# Altium PCB PCB1.PcbDoc (part 2 of 2)
Units mm, origin at the board's own origin, x right, y up, seen from the top; angles counter-clockwise.
Board outline 152.5 x 85 mm, 4 copper layers (Top Layer, GND, PWR/GND, Bottom Layer), stack 1.598 mm thick; 151 components, 100 nets, 477 pads, 653 vias.
Unrouted connection lines stored in the file: 110.
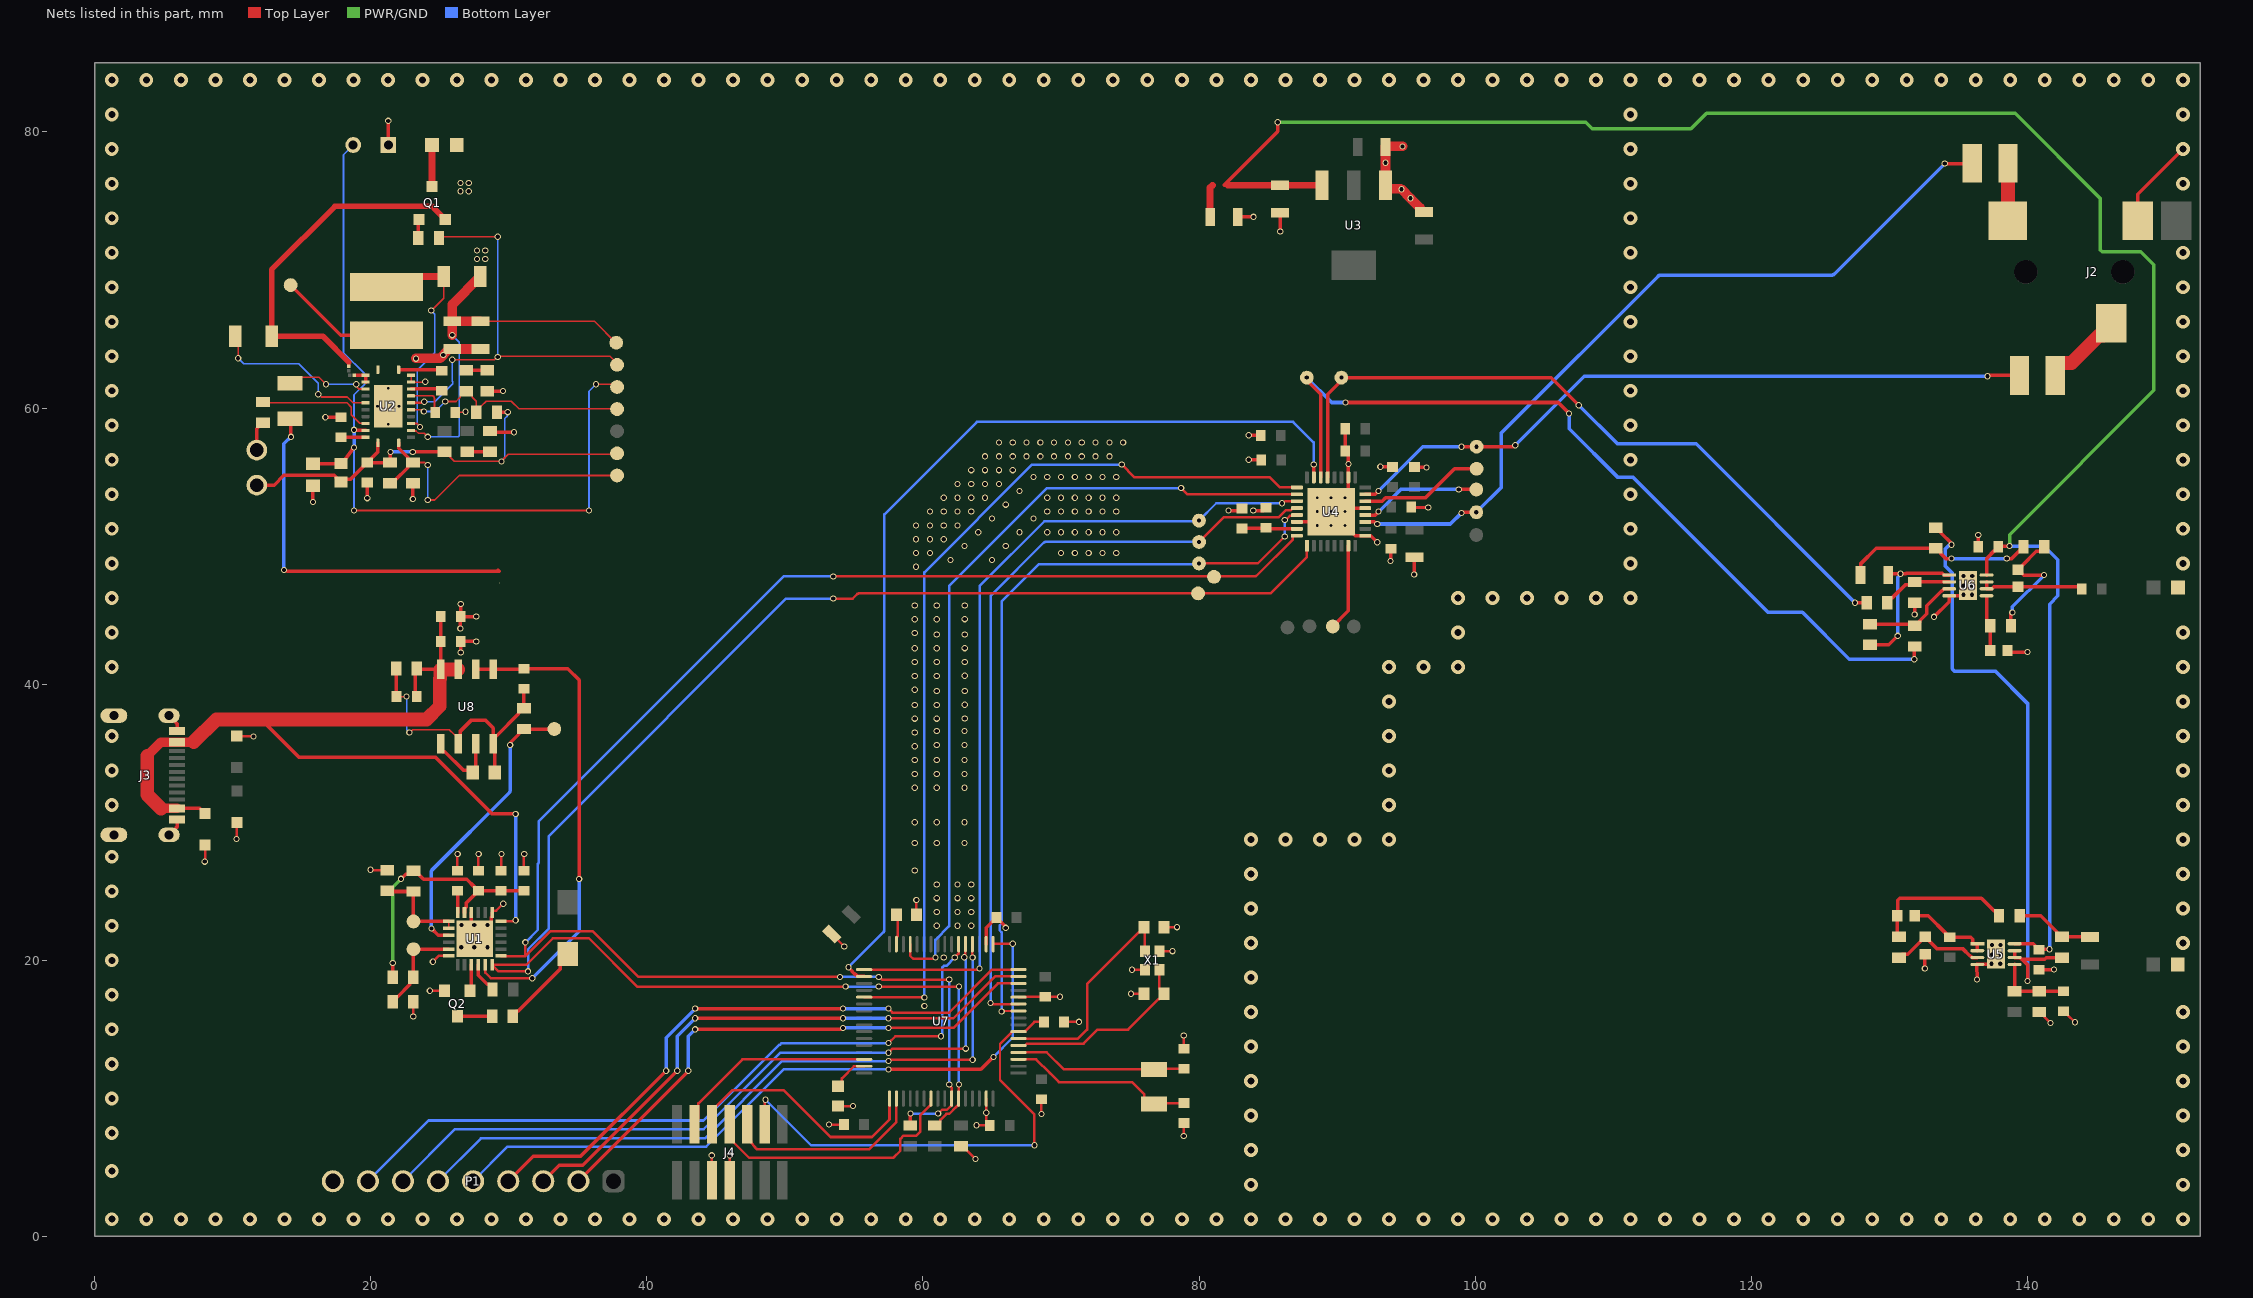
[diagram p4: the nets of this part, all layers, seen from the top]

## Via types
v1: diameter 0.45, hole 0.3, Top Layer to Bottom Layer, tented both sides, 416 vias
v2: diameter 1, hole 0.5, Top Layer to Bottom Layer, tented both sides, 224 vias
v3: diameter 0.5, hole 0.2, Top Layer to Bottom Layer, 13 vias

## Nets (pads, with @x,y where several pads share a name; then routed paths per layer and width w, separated by ;. In a path a pad name is that pad's centre, name@x,y a point inside that pad or via, vN(x,y) a via of type N, cw(c..) or ccw(c..) an arc to the next point about the centre after c; other vN are vias at no path point) (continued)
GND: BT1.2 C7.2 C8.2 C10.2 C11.2 C12.2 C13.2 C14.2 C15.2 C16.2 C17.2 C18.2 C19.2 C20.2 C22.2 C23.2 C24.2 C25.2 C28.2 C29.2 C30.2 C31.1 C32.1 C34.2 C35.2 C36.2 C37.2 C38.2 C39.2 C40.1 C41.2 C42.2 C43.2 C44.2 C45.2 C46.2 C47.2 C48.2 C49.2 C50.2 C51.2 C52.2 C53.2 C54.2 C55.2 D1.1 D2.1 D3.1 J1.2 J2.4 J3.A1_B12 J3.B1_A12 J3.SH1 J3.SH2 J3.SH3 J3.SH4 J4.5 J4.7 J5.2 P1.9 Q2.2 R10.2 R12.1 R27.1 R30.1 R32.1 R33.1 R34.1 R35.2 R36.1 R40.2 U1.6 U1.19 U1.22 U1.25 U2.22 U2.23 U2.25 U3.1 U4.6 U4.17 U4.21 U4.26 U4.33 U5.4 U5.9 U6.4 U6.9 U7.12 U7.18 U7.63 X1.2 X1.4 | length 117.6
  Top Layer w0.12: U2.23@22.925,62.378 U2.22@22.925,61.878 23.928,61.878 v1(23.95,61.9) ; C32.1@26.125,59.69 26.84,59.69 v1(26.875,59.725)
  Top Layer w0.18: v1@8.011,27.171 D3.1@8.011,28.362 ; D1.1@10.298,36.23 v1@11.489,36.23 ; v1@10.308,28.802 D2.1@10.308,29.993 ; v1@20.003,26.533 R36.1@21.194,26.533 ; v1(23.087,15.92) R35.2@23.087,16.995 ; v1(24.284,17.795) Q2.2@25.359,17.795 ; v1(24.5,19.9) 24.917,20.317 U1.6@25.652,20.317 ; C37.2@26.274,26.483 26.274,27.674 v1(26.3,27.7) ; C38.2@27.794,26.483 v1@27.794,27.674 ; U1.19@28.794,23.549 28.831,23.586 29.086,23.586 v1(29.6,24.1) ; C40.1@29.449,26.483 v1@29.449,27.674 ; C39.2@31.1,26.483 v1@31.1,27.674 ; J4.5@44.7,4.8 v1(44.7,5.875) ; J4.7@46,4.8 v1(46,5.875) ; v1(53.2,8.1) C49.2@54.275,8.1 ; C46.2@53.395,21.899 53.401,21.899 v1(54.3,21) ; C53.2@53.848,9.44 v1(54.923,9.44) ; C52.2@59.52,23.3 v1(59.52,24.375) ; R40.2@62.761,6.538 62.862,6.538 v1(63.8,5.6) ; v1@63.882,8.05 C50.2@64.83,8.05 64.579,8.301 U7.63@64.579,9.987 ; U7.12@66.92,17.328 67.417,17.328 67.446,17.358 C51.2@68.857,17.358 v1(69.932,17.358) ; v1(68.58,8.868) C48.2@68.58,9.943 ; C41.2@70.217,15.543 v1(71.292,15.543) ; v1@75.063,17.575 C43.2@76.011,17.575 ; v1(75.13,19.314) X1.2@76.079,19.313 ; X1.4@77.129,20.663 v1(78.078,20.662) ; C42.2@77.451,22.401 v1(78.4,22.4) v1(78.4,22.4) ; v1@78.89,7.266 C45.2@78.89,8.214 ; C44.2@78.89,13.601 v1(78.891,14.55) ; R12.1@141.073,16.036 v1(141.666,15.462) ; C22.2@142.851,16.086 v1(143.444,15.512)
  Top Layer w0.254: J3.SH2@5.397,29.081 5.432,29.081 5.799,29.449 5.799,29.483 5.972,29.656 J3.B1_A12@5.972,30.201 ; J3.SH1@5.397,37.721 5.432,37.721 5.799,37.353 5.799,37.319 5.972,37.146 J3.A1_B12@5.972,36.601 ; v1(15.814,53.194) R30.1@15.814,54.325 ; v1(16.715,59.328) C31.1@17.846,59.328 ; v1(19.751,53.471) C34.2@19.751,54.602 ; R27.1@21.275,79.051 v1(21.275,80.8) ; v1(23.053,53.421) R32.1@23.053,54.552 ; v1(26.494,44.025) C25.2@26.494,44.925 ; v1(26.519,45.8) C25.2@26.519,44.9 v1(27.65,44.9) ; v1(26.525,42.3) 26.519,42.827 C24.2@26.519,43.1 v1(27.65,43.1) ; U1.22@27.294,23.459 27.294,21.817 U1.25@27.544,21.567 28.736,22.759 28.736,23.122 28.794,23.18 U1.19@28.794,23.459 ; R34.1@28.448,61.226 v1(29.579,61.226) ; R33.1@28.641,58.338 28.729,58.25 v1(30.375,58.25) ; U7.18@64.579,21.17 64.579,22.354 65.052,22.827 65.102,22.827 C47.2@65.325,23.05 ; C47.2@65.325,23.1 C47.2@65.325,23.05 ; v1(66,22.35) 65.962,22.388 65.962,22.463 65.598,22.827 65.548,22.827 C47.2@65.325,23.05 ; v1(82.125,52.575) 82.95,52.575 C16.2@83.1,52.725 ; C23.2@82.803,73.847 v1(83.934,73.847) ; v1(83.6,56.25) C19.2@84.5,56.25 ; v1(83.6,58.025) C18.2@84.5,58.025 ; v1(83.925,52.575) 84.641,52.575 C17.2@84.836,52.77 ; C30.2@85.867,74.133 85.868,73.91 v1(85.875,72.775) ; U4.6@87.083,51.75 88.308,51.75 v3(88.558,51.5) ; v3(90.558,51.5) 91.308,50.75 U4.17@92.033,50.75 92.046,50.737 92.438,50.737 v1(92.9,50.275) ; v3(90.558,52.5) 90.808,52.75 U4.21@92.033,52.75 ; v3(90.558,53.5) 90.808,53.75 U4.26@90.808,54.975 90.808,56.478 90.798,56.488 90.798,56.677 C55.2@90.575,56.9 C54.2@90.575,58.5 ; v1(93.125,55.75) C15.2@94.025,55.75 ; v1(93.864,48.93) C12.2@93.864,49.83 ; C11.2@95.351,52.791 95.599,52.793 v1(96.6,52.8) ; v1(95.575,47.95) C13.2@95.575,49.225 ; C14.2@95.575,55.7 v1(96.475,55.7) ; v1(131.825,45.05) 131.826,45.051 R10.2@131.826,45.899 ; v1(132.563,19.402) C7.2@132.563,20.302 ; v1(133.225,44.875) 134.331,45.981 U6.4@134.331,46.403 135.228,46.403 U6.9@135.325,46.5 ; U5.4@136.338,19.725 v1(136.35,18.6) ; U5.4@136.363,19.7 137.191,19.7 137.714,20.223 U5.9@137.714,20.45 ; C20.2@136.435,49.951 v1(136.436,50.8) ; C8.2@138.549,42.446 138.67,42.325 v1(140,42.325) ; C10.2@140.825,19.325 v1(141.925,19.325) ; J2.4@147.98,73.553 147.98,75.48 v2(151.25,78.75)
  Top Layer w0.7: v1@23.275,63.6 25.018,63.6 25.608,64.19 25.608,64.278 C36.2@25.908,64.278 C35.2@27.94,64.278 ; U3.1@93.501,76.009 93.626,75.884 94.616,75.884 v1(94.651,75.849) v1(95.308,75.192) 96,74.5 96,74.2 C28.2@96.3,74.2 ; U3.1@93.501,76.133 U3.1@93.501,76.133 v1(93.5,77.766) C29.2@93.5,78.9 93.5,78.95 v1(94.725,78.95)
  other v1: 78.889,7.265 63.881,8.051 64.579,8.958 60.1,16.7 75.062,17.576 137.4,19.75 138.025,19.75 61.5,20.2 137.425,20.425 138.05,20.425 26.556,20.94 27.505,20.94 28.454,20.94 137.425,21.1 138.05,21.1 61,22.5 62.5,22.5 63.5,22.5 26.575,22.55 27.5,22.55 28.45,22.55 61,23.5 62.5,23.5 63.5,23.5 61,24.5 62.5,24.5 63.5,24.5 61,25.5 62.5,25.5 63.5,25.5 59.4,26.5 19.977,26.559 7.985,27.145 27.82,27.7 29.475,27.7 31.126,27.7 59.4,28.5 61,28.5 63,28.5 10.282,28.776 59.4,30 61,30 63,30 59.4,32.5 61,32.5 63,32.5 59.4,33.5 61,33.5 63,33.5 59.4,34.5 61,34.5 63,34.5 59.4,35.5 61,35.6 63,35.6 11.515,36.204 59.4,36.5 61,36.6 63,36.6 59.4,37.5 61,37.5 63.029,37.507 59.4,38.5 61,38.5 63.029,38.507 61,39.5 63.029,39.507 59.4,39.6 59.4,40.6 61,40.6 63.029,40.607 59.4,41.6 61,41.6 63.029,41.607 59.4,42.6 61,42.6 63.029,42.607 61,43.6 63.029,43.607 59.4,43.7 59.4,44.7 61,44.7 63.029,44.707 59.4,45.7 61,45.7 63.029,45.707 135.35,46.475 135.975,46.475 135.375,47.15 136,47.15 135.375,47.825 136,47.825 59.5,48.5 62,49 65,49 59.5,49.5 60.5,49.5 70,49.5 71,49.5 72,49.5 73,49.5 74,49.5 63,50 66,50 59.5,50.5 60.5,50.5 61.5,50.5 64,51 67,51 69,51 70,51 71,51 72,51 73,51 74,51 59.5,51.5 60.5,51.5 61.5,51.5 62.5,51.5 65,52 68,52 60.5,52.5 61.5,52.5 62.5,52.5 63.5,52.5 69,52.5 70,52.5 71,52.5 72,52.5 73,52.5 74,52.5 66,53 61.5,53.5 62.5,53.5 63.5,53.5 64.5,53.5 69,53.5 70,53.5 71,53.5 72,53.5 73,53.5 74,53.5 67,54 62.5,54.5 63.5,54.5 64.5,54.5 65.5,54.5 68,55 69,55 70,55 71,55 72,55 73,55 74,55 63.5,55.5 64.5,55.5 65.5,55.5 66.5,55.5 90.825,55.95 64.5,56.5 65.5,56.5 66.5,56.5 67.5,56.5 68.5,56.5 69.5,56.5 70.5,56.5 71.5,56.5 72.5,56.5 73.5,56.5 65.5,57.5 66.5,57.5 67.5,57.5 68.5,57.5 69.5,57.5 70.5,57.5 71.5,57.5 72.5,57.5 73.5,57.5 74.5,57.5 23.275,63.575 25.25,63.85
  other v2: 1.25,1.25 3.75,1.25 6.25,1.25 8.75,1.25 11.25,1.25 13.75,1.25 16.25,1.25 18.75,1.25 21.25,1.25 23.75,1.25 26.25,1.25 28.75,1.25 31.25,1.25 33.75,1.25 36.25,1.25 38.75,1.25 41.25,1.25 43.75,1.25 46.25,1.25 48.75,1.25 51.25,1.25 53.75,1.25 56.25,1.25 58.75,1.25 61.25,1.25 63.75,1.25 66.25,1.25 68.75,1.25 71.25,1.25 73.75,1.25 76.25,1.25 78.75,1.25 81.25,1.25 83.75,1.25 86.25,1.25 88.75,1.25 91.25,1.25 93.75,1.25 96.25,1.25 98.75,1.25 101.25,1.25 103.75,1.25 106.25,1.25 108.75,1.25 111.25,1.25 113.75,1.25 116.25,1.25 118.75,1.25 121.25,1.25 123.75,1.25 126.25,1.25 128.75,1.25 131.25,1.25 133.75,1.25 136.25,1.25 138.75,1.25 141.25,1.25 143.75,1.25 146.25,1.25 148.75,1.25 151.25,1.25 83.75,3.75 151.25,3.75 1.25,4.75 83.75,6.25 151.25,6.25 1.25,7.5 83.75,8.75 151.25,8.75 1.25,10 83.75,11.25 151.25,11.25 1.25,12.5 83.75,13.75 151.25,13.75 1.25,15 83.75,16.25 151.25,16.25 1.25,17.5 83.75,18.75 1.25,20 83.75,21.25 151.25,21.25 1.25,22.5 83.75,23.75 151.25,23.75 1.25,25 83.75,26.25 151.25,26.25 1.25,27.5 83.75,28.75 86.25,28.75 88.75,28.75 91.25,28.75 93.75,28.75 151.25,28.75 1.25,31.25 93.75,31.25 151.25,31.25 1.25,33.75 93.75,33.75 151.25,33.75 1.25,36.25 93.75,36.25 151.25,36.25 93.75,38.75 151.25,38.75 1.25,41.25 93.75,41.25 96.25,41.25 98.75,41.25 151.25,41.25 1.25,43.75 98.75,43.75 151.25,43.75 1.25,46.25 98.75,46.25 101.25,46.25 103.75,46.25 106.25,46.25 108.75,46.25 111.25,46.25 1.25,48.75 111.25,48.75 151.25,48.75 1.25,51.25 111.25,51.25 151.25,51.25 1.25,53.75 111.25,53.75 151.25,53.75 1.25,56.25 111.25,56.25 151.25,56.25 1.25,58.75 111.25,58.75 151.25,58.75 1.25,61.25 111.25,61.25 151.25,61.25 1.25,63.75 111.25,63.75 151.25,63.75 1.25,66.25 111.25,66.25 151.25,66.25 1.25,68.75 111.25,68.75 151.25,68.75 1.25,71.25 111.25,71.25 151.25,71.25 1.25,73.75 111.25,73.75 1.25,76.25 111.25,76.25 151.25,76.25 1.25,78.75 111.25,78.75 1.25,81.25 111.25,81.25 151.25,81.25 1.25,83.75 3.75,83.75 6.25,83.75 8.75,83.75 11.25,83.75 13.75,83.75 16.25,83.75 18.75,83.75 21.25,83.75 23.75,83.75 26.25,83.75 28.75,83.75 31.25,83.75 33.75,83.75 36.25,83.75 38.75,83.75 41.25,83.75 43.75,83.75 46.25,83.75 48.75,83.75 51.25,83.75 53.75,83.75 56.25,83.75 58.75,83.75 61.25,83.75 63.75,83.75 66.25,83.75 68.75,83.75 71.25,83.75 73.75,83.75 76.25,83.75 78.75,83.75 81.25,83.75 83.75,83.75 86.25,83.75 88.75,83.75 91.25,83.75 93.75,83.75 96.25,83.75 98.75,83.75 101.25,83.75 103.75,83.75 106.25,83.75 108.75,83.75 111.25,83.75 113.75,83.75 116.25,83.75 118.75,83.75 121.25,83.75 123.75,83.75 126.25,83.75 128.75,83.75 131.25,83.75 133.75,83.75 136.25,83.75 138.75,83.75 141.25,83.75 143.75,83.75 146.25,83.75 148.75,83.75 151.25,83.75
  other v3: 89.558,51.5 88.558,52.5 89.558,52.5 88.558,53.5 89.558,53.5 21.275,58.828 20.5,60.128 22.05,60.128 21.275,61.428
HPLCOM: TP25.1 U4.20 | length 8.8
  Top Layer w0.254: U4.20@92.033,52.25 92.75,52.25 v1(93,52.5) ; v1(98.8,54.1) 100.074,54.1 TP25.1@100.076,54.102
  Bottom Layer w0.254: v1(93,52.5) 94.6,54.1 v1(98.8,54.1)
HPLOUT: C9.2 TP5.1 U4.19 | length 57.1
  Top Layer w0.254: U4.19@92.033,51.75 92.697,51.75 92.847,51.6 v1(92.9,51.6) ; v1(99,52.4) 99.053,52.4 99.104,52.451 v1(100.076,52.451) ; v1(134,77.7) 135.961,77.7 C9.2@135.987,77.726
  Bottom Layer w0.254: v1(92.9,51.6) 98.2,51.6 v1(99,52.4) ; v1(100.076,52.451) 101.9,54.275 101.9,58.2 113.251,69.551 cw(c113.43,69.371) 113.278,69.574 cw(c113.43,69.371) 113.43,69.625 125.82,69.625 ccw(c125.82,69.879) 125.972,69.676 ccw(c125.82,69.879) 125.999,69.699 v1(134,77.7)
HPRCOM: TP26.1 U4.22 | length 9
  Top Layer w0.254: U4.22@92.033,53.25 93.254,53.25 93.504,53.5 96.4,53.5 98.5,55.6 TP26.1@100.1,55.6
HPROUT: C21.2 TP7.1 U4.23 | length 50.9
  Top Layer w0.254: U4.23@92.033,53.75 92.75,53.75 v1(93,54) ; v1(99,57.2) v1(100.1,57.2) 102.747,57.2 102.847,57.3 v1(102.9,57.3) ; v1(137.1,62.3) 137.153,62.3 137.212,62.359 C21.2@139.416,62.359
  Bottom Layer w0.254: v1(93,54) 96.2,57.2 v1(99,57.2) ; v1(102.9,57.3) 107.9,62.3 v1(137.1,62.3)
HSE_IN: C43.1 U7.5 X1.3 | length 14
  Top Layer w0.18: U7.5@66.92,13.828 67.399,13.828 67.424,13.853 67.424,13.865 67.529,13.97 71.628,13.97 72.644,14.986 74.862,14.986 77.061,17.185 77.106,17.185 77.451,17.53 C43.1@77.451,17.575 77.451,17.62 77.129,17.942 X1.3@77.129,19.313
HSE_OUT: C42.1 U7.6 X1.1 | length 16.2
  Top Layer w0.18: U7.6@66.92,14.328 71.224,14.328 71.882,14.986 71.882,18.272 75.651,22.041 75.696,22.041 76.011,22.356 C42.1@76.011,22.401 76.079,22.333 X1.1@76.079,20.663
IOVDD: C16.1 C17.1 U4.7 | length 4
  Top Layer w0.254: C16.1@83.1,51.275 84.791,51.275 C17.1@84.836,51.32 85.109,51.25 U4.7@87.083,51.25
ISET: R21.1 R32.2 TP18.1 U2.13 | length 22.3
  Top Layer w0.12: R32.2@22.928,56.052 23.895,56.052 24.067,55.88 v1(24.13,55.88) ; v1(24.13,53.34) 24.638,53.34 26.416,55.118 TP18.1@37.846,55.118
  Top Layer w0.254: R21.1@21.402,54.552 21.65,54.8 21.801,54.8 22.68,55.679 22.68,55.804 22.928,56.052 22.68,56.3 22.68,56.425 22.025,57.08 U2.13@22.025,57.478
  Bottom Layer w0.12: v1(24.13,53.34) v1(24.13,55.88)
ISINK_COARSE: R25.1 R35.1 TP22.1 U1.5 | length 7.1
  Top Layer w0.254: R35.1@21.587,16.995 21.587,17.12 21.835,17.368 21.96,17.368 22.839,18.247 22.839,18.525 R25.1@23.087,18.773 23.099,18.785 TP22.1@23.099,20.805 23.111,20.817 U1.5@25.652,20.817
JTDI: J4.10 U7.50 | length 14.6
  Top Layer w0.187: J4.10@47.27,8.135 47.547,6.833 47.834,6.449 ccw(c47.984,6.561) 47.851,6.429 47.925,6.355 ; 47.926,6.354 ccw(c48.057,6.487) 48.057,6.3 56.023,6.3 ccw(c56.023,6.487) 56.135,6.337 ccw(c56.023,6.487) 56.155,6.355 58.079,8.279 U7.50@58.079,9.987
LSE_IN: C45.1 U7.3 Y1.2 | length 13.5
  Top Layer w0.18: U7.3@66.92,12.828 68.199,12.828 69.195,11.832 ; 69.195,11.831 69.85,11.176 75.149,11.176 76.016,10.309 76.016,10.054 76.476,9.594 Y1.2@76.731,9.594 76.801,9.664 C45.1@78.89,9.664
LSE_OUT: C44.1 U7.4 Y1.1 | length 12.5
  Top Layer w0.18: U7.4@66.92,13.328 68.968,13.328 70.202,12.094 Y1.1@76.731,12.094 76.788,12.151 C44.1@78.89,12.151
MCU_GPIO_PB13: U4.31 U7.34 | length 72.3
  Top Layer w0.254: v1(54.6,19.5) 54.891,19.209 54.891,19.18 55.101,18.97 55.13,18.97 55.272,18.828 U7.34@55.737,18.828 ; v1(88.3,55.9) 88.308,55.892 U4.31@88.308,54.975
  Bottom Layer w0.187: v1(54.6,19.5) 57.145,22.045 ccw(c57.013,22.177) 57.163,22.065 ccw(c57.013,22.177) 57.2,22.177 57.2,52.3 63.9,59 86.8,59 88.3,57.5 v1(88.3,55.9)
MCU_I2C_SCL: R38.1 TP13.1 U1.13 U4.8 U7.58 | length 121.7
  Top Layer w0.18: U1.13@29.436,20.317 29.453,20.3 31.2,20.3 ; v1(31.2,21.3) 31.2,20.3 ; v1(53.5,47.8) 84.025,47.8 ccw(c84.025,47.98) 84.133,47.836 ccw(c84.025,47.98) 84.153,47.853 86.788,50.488 86.788,50.7 86.838,50.75 U4.8@87.083,50.75 ; v1(54,18.8) 39.4,18.8 36.1,22.1 33,22.1 31.2,20.3 ; v1(56.8,18.8) 56.84,18.8 57.04,18.6 v1(61.9,18.6) ; v1(61.1,8.9) 61.378,9.178 61.737,9.178 62.052,9.493 62.064,9.493 62.079,9.508 U7.58@62.079,9.987 62.079,10.77 61.9,10.948 v1(61.9,11)
  Top Layer w0.254: R38.1@59.078,8.038 59.078,8.878 v1(59.1,8.9)
  Bottom Layer w0.18: v1(31.2,21.3) 32.1,22.2 32.1,26.924 cw(c32.28,26.924) 32.136,27.032 cw(c32.28,26.924) 32.155,27.053 32.155,30.055 49.9,47.8 v1(53.5,47.8) ; v1(54,18.8) v1(56.8,18.8) ; v1(59.1,8.9) v1(61.1,8.9) ; v1(61.9,11) v1(61.9,18.6)
MCU_I2C_SDA: R39.1 TP27.1 U1.12 U4.9 U7.59 | length 124.4
  Top Layer w0.18: v1(31.4,19.2) 29.269,19.2 U1.12@28.794,19.675 31.275,19.675 33.2,21.6 35.8,21.6 39.3,18.1 v1(54.4,18.1) ; v1(53.5,46.2) 54.911,46.193 55.239,46.522 cw(c55.367,46.395) 55.259,46.539 cw(c55.367,46.395) 55.367,46.575 TP27.1@79.925,46.575 ; v1(56.8,18.1) v1(62.6,18.1) ; R39.1@60.856,8.038 60.981,8.038 61.266,8.323 61.266,8.444 61.695,8.873 61.907,8.873 62.4,9.366 62.4,9.378 62.515,9.493 62.564,9.493 62.579,9.508 U7.59@62.579,9.987 62.579,10.979 v1(62.6,11) ; TP27.1@79.925,46.6 85.2,46.6 87.808,49.208 U4.9@87.808,50.025
  Bottom Layer w0.18: v1(31.4,19.2) 31.4,20.8 32.9,22.3 32.9,29 50.094,46.193 v1@53.5,46.193 ; v1(54.4,18.1) v1(56.8,18.1) ; v1(62.6,11) v1(62.6,18.1)
MCU_I2S_BCLK: U4.2 U7.29 | length 58.4
  Top Layer w0.187: U7.29@59.079,21.17 59.079,20.321 59.3,20.1 60.729,20.1 60.829,20.2 v1(60.9,20.2) ; v1(78.7,54.2) 79.15,53.75 U4.2@87.083,53.75
  Bottom Layer w0.187: v1(60.9,20.2) 60.9,21.469 61.9,22.469 61.9,47.1 69,54.2 v1(78.7,54.2)
MCU_I2S_ext_SD: TP12.1 U4.5 U7.10 | length 55.7
  Top Layer w0.18: v1(65.7,16.3) 65.728,16.328 U7.10@66.92,16.328 ; v1(79.99,48.746) 84.246,48.746 v1(86.2,50.7) ; v1(86.2,51.9) 86.273,51.9 86.573,52.2 86.748,52.2 86.798,52.25 U4.5@87.083,52.25
  Bottom Layer w0.18: v1(65.7,16.3) 65.7,22.028 65.56,22.168 65.56,22.532 65.7,22.672 65.7,46 68.4,48.7 79.944,48.7 v1(79.99,48.746) ; v1(86.2,50.7) v1(86.2,51.9)
MCU_I2S_MCLK: U4.1 U7.37 | length 66.1
  Top Layer w0.187: U7.37@55.737,17.328 60.072,17.328 v1(60.1,17.3) ; v1(74.4,55.9) 75.3,55 85.1,55 85.85,54.25 U4.1@87.083,54.25
  Bottom Layer w0.187: v1(60.1,17.3) 60.1,48.1 67.9,55.9 v1(74.4,55.9)
MCU_I2S_SD: TP11.1 U4.4 U7.11 | length 56.3
  Top Layer w0.18: v1(64.9,16.9) 64.972,16.828 U7.11@66.92,16.828 ; v1(80,50.3) 81.8,52.1 85.778,52.1 86.283,52.605 86.653,52.605 86.798,52.75 U4.4@87.083,52.75
  Bottom Layer w0.18: v1(64.9,16.9) 64.9,46.325 cw(c65.08,46.325) 64.936,46.433 cw(c65.08,46.325) 64.952,46.452 68.748,50.248 cw(c68.875,50.12) 68.767,50.264 cw(c68.875,50.12) 68.875,50.3 v1(80,50.3)
MCU_I2S_WS: TP10.1 U4.3 U7.33 | length 61.6
  Top Layer w0.18: U7.33@55.737,19.328 63.954,19.328 ccw(c63.954,19.508) 64.081,19.381 v1(64.1,19.4) ; v1(86,53.1) 86.073,53.1 86.223,53.25 U4.3@87.083,53.25
  Bottom Layer w0.18: v1(64.1,19.4) 64.1,47.1 68.8,51.8 79.944,51.8 v1(79.99,51.846) 81.244,53.1 v1(86,53.1)
MICBIAS: TP8.1 U4.15 | length 6.3
  Top Layer w0.254: TP8.1@89.681,44.18 90.808,45.307 U4.15@90.808,50.025
nBATDRV: R18.2 TP14.1 U2.19 | length 30.6
  Top Layer w0.12: R18.2@24.946,72.32 25.026,72.4 v1(29.2,72.4) ; v1(25.908,63.5) 28.956,63.5 29.21,63.754 37.338,63.754 TP14.1@37.846,63.246
  Top Layer w0.18: U2.19@22.925,60.378 23.729,60.378 23.803,60.452 v1(23.876,60.452)
  Bottom Layer w0.12: v1(23.876,60.452) 24.638,60.452 25.943,61.757 25.943,61.913 25.908,61.948 v1(25.908,63.5) ; v1(29.2,63.7) v1(29.2,72.4)
NetC1_1: C1.1 R2.1 U6.1 | length 11.4
  Top Layer w0.254: R2.1@128.6,42.85 129.95,42.85 v1(130.6,43.5) ; C1.1@129.905,47.903 130.002,48 v1(130.8,48) 131.196,48 131.222,48.026 133.835,48.026 133.958,47.903 U6.1@134.331,47.903
  Bottom Layer w0.254: v1(130.6,43.5) 130.6,47.753 130.8,47.953 v1(130.8,48)
NetC1_2: C1.2 R1.1 R3.2 | length 13.7
  Top Layer w0.254: C1.2@127.905,47.903 127.905,48.705 129.036,49.836 R1.1@133.35,49.836 ; R1.1@133.475,49.836 133.723,49.588 133.723,49.463 134.086,49.1 v1(134.5,49.1) ; v1(138.5,49.1) 138.861,49.1 R3.2@139.712,49.951
  Bottom Layer w0.254: v1(134.5,49.1) v1(138.5,49.1)
NetC2_1: C2.1 R3.1 R8.2 | length 9.3
  Top Layer w0.254: R8.2@138.799,44.224 138.799,45.046 138.9,45.147 v1(138.9,45.2) ; C2.1@139.319,48.292 C2.1@139.346,48.292 ; v1(141.2,47.9) 139.737,47.9 C2.1@139.346,48.292 ; R3.1@141.212,49.951 141.212,49.863 140.964,49.615 140.642,49.615 139.598,48.571 139.598,48.544 C2.1@139.346,48.292
  Bottom Layer w0.254: v1(138.9,45.2) 138.9,45.6 v1(141.2,47.9)
NetC2_2: C2.2 C6.1 U6.6 U6.7 | length 7.5
  Top Layer w0.254: U6.7@137.033,47.403 U6.6@137.033,46.903 137.405,46.903 137.54,47.038 C2.2@139.319,47.038 143.793,47.038 C6.1@143.928,46.903
NetC3_1: C3.1 R5.1 R6.2 | length 10.7
  Top Layer w0.254: R6.2@130.683,21.696 130.564,21.815 C3.1@130.564,23.232 130.6,23.268 130.6,24.351 130.749,24.5 136.666,24.5 137.561,23.605 137.686,23.605 137.934,23.357 R5.1@137.934,23.232
NetC3_2: C3.2 C5.1 U5.1 U5.2 | length 6.1
  Top Layer w0.254: C3.2@131.818,23.232 132.805,23.232 134.093,21.944 134.093,21.894 134.316,21.671 C5.1@134.366,21.671 135.871,21.671 136.02,21.522 136.02,21.206 136.025,21.2 U5.1@136.363,21.2 U5.2@136.363,20.7
NetC4_2: C4.2 R4.1 R5.2 | length 5.8
  Top Layer w0.254: R5.2@139.434,23.232 140.958,23.232 142.121,22.069 142.121,21.944 142.369,21.696 R4.1@142.494,21.696 142.498,21.692 C4.2@144.526,21.692
NetC7_1: C7.1 R6.1 U5.3 | length 6.9
  Top Layer w0.254: R6.1@130.683,20.196 130.931,20.444 131.328,20.444 132.309,21.425 132.309,21.452 132.561,21.704 C7.1@132.588,21.704 ; C7.1@132.615,21.704 132.867,21.452 132.867,21.425 133.469,20.823 135.328,20.823 135.824,20.327 135.864,20.327 135.99,20.2 U5.3@136.363,20.2
NetC8_1: C8.1 R8.1 U6.5 | length 4.1
  Top Layer w0.254: U6.5@137.033,46.403 137.033,44.615 137.299,44.349 R8.1@137.299,44.224 137.299,42.45 C8.1@137.295,42.446
NetC9_1: C9.1 J2.2 | length 4.2
  Top Layer w1: J2.2@138.582,73.553 138.587,73.557 C9.1@138.587,77.726
NetC21_1: C21.1 J2.3 | length 6.2
  Top Layer w1: C21.1@142.016,62.359 142.016,63.059 142.216,63.259 143.183,63.259 145.178,65.254 145.471,65.254 146.075,65.859 J2.3@146.075,66.151
NetC22_1: C22.1 R11.1 R12.2 U5.5 | length 5.5
  Top Layer w0.254: U5.5@139.065,19.7 R11.1@139.065,17.759 R12.2@140.843,17.759 C22.1@142.621,17.759
NetC26_2: C26.2 C27.2 R14.1 R15.1 R17.2 U8.2 U8.4 | length 21.5
  Top Layer w0.12: C26.2@21.875,39.1 v1(22.6,39.1) ; v1(22.8,36.5) 22.835,36.5 23.035,36.7 25.7,36.7 26.064,36.336 26.119,36.336 26.339,36.116 U8.2@26.339,35.685
  Top Layer w0.254: R15.1@21.846,41.125 21.846,39.129 C26.2@21.875,39.1 ; U8.2@26.339,35.685 26.472,35.818 26.472,36.572 27.3,37.4 28.3,37.4 28.879,36.821 U8.4@28.879,36.116 ; R14.1@29,33.6 29,35.563 U8.4@28.879,35.685 U8.4@28.879,36.116 ; C27.2@31.1,39.675 R17.2@31.1,38.25 30.975,38.25 30.727,38.002 30.727,37.877 29.119,36.269 29.031,36.269 U8.4@28.879,36.116
  Bottom Layer w0.12: v1(22.6,39.1) 22.6,36.7 v1(22.8,36.5)
NetC31_2: C31.2 U2.11 | length 1.8
  Top Layer w0.254: C31.2@17.846,57.878 U2.11@19.625,57.878
NetC32_2: C32.2 U2.20 | length 2.8
  Top Layer w0.12: U2.20@22.925,60.878 23.165,60.878 24.477,60.878 cw(c24.477,60.758) 24.582,60.815 24.584,60.813 ccw(c24.746,60.901) 24.591,60.799 cw(c24.491,60.734) 24.603,60.777 cw(c24.331,60.672) 24.622,60.672 24.622,60.03 C32.2@24.675,59.69
NetC33_1: C33.1 U2.21 | length 2.3
  Top Layer w0.254: U2.21@22.925,61.378 25.019,61.378 C33.1@25.146,61.251
NetC37_1: C37.1 U1.24 | length 1.6
  Top Layer w0.254: C37.1@26.274,25.033 26.294,25.013 U1.24@26.294,23.459
NetD4_2: D4.2 R31.2 | length 2.2
  Top Layer w0.254: D4.2@11.75,56.953 11.75,58.498 11.819,58.567 11.819,58.692 12.067,58.94 R31.2@12.192,58.94
NetD5_1: D5.1 R37.2 | length 6.2
  Top Layer w0.254: R37.2@30.294,15.941 30.294,16.066 30.542,16.314 30.667,16.314 33.713,19.36 33.713,19.892 D5.1@34.275,20.454
NetL1_2: L1.2 R19.1 U2.16 | length 17.2
  Top Layer w0.12: U2.16@22.925,58.878 23.37,58.878 23.576,58.673 v1(23.576,58.628) ; v1(24.384,67.056) 25.284,67.956 R19.1@25.284,69.526
  Top Layer w0.5: L1.2@21.148,68.764 22.798,68.764 23.56,69.526 R19.1@25.284,69.526
  Bottom Layer w0.12: v1(23.576,58.628) 23.403,58.8 cw(c23.488,58.885) 23.368,58.885 23.368,62.688 cw(c23.488,62.688) 23.392,62.76 cw(c23.488,62.688) 23.402,62.772 24.638,64.008 24.638,66.802 v1(24.384,67.056)
NetQ1_1: Q1.1 R18.1 | length 1.4
  Top Layer w0.254: R18.1@23.446,72.32 23.446,73.606 Q1.1@23.5,73.66
NetQ2_3: Q2.3 R37.1 | length 2.5
  Top Layer w0.254: Q2.3@26.274,15.941 R37.1@28.794,15.941
NetR2_2: R2.2 R7.1 U6.3 | length 7.3
  Top Layer w0.254: R2.2@128.6,44.35 131.7,44.35 R7.1@131.826,44.224 131.951,44.224 132.199,44.472 132.199,44.597 132.7,45.098 132.7,45.684 133.792,46.776 133.832,46.776 133.958,46.903 U6.3@134.331,46.903
NetR9_1: R9.1 R10.1 U6.2 | length 5.2
  Top Layer w0.254: R9.1@129.85,45.9 129.85,46.025 130.098,46.273 130.223,46.273 131.135,47.185 131.612,47.185 R10.1@131.826,47.399 131.83,47.403 U6.2@134.331,47.403
NetR14_2: R14.2 U8.1 U8.3 | length 5.6
  Top Layer w0.254: U8.1@25.069,35.685 25.069,35.253 25.221,35.1 25.372,35.1 26.718,33.755 27.245,33.755 R14.2@27.4,33.6 27.609,33.809 U8.3@27.609,35.685
NetR16_2: R16.2 U2.4 | length 6.1
  Top Layer w0.12: R16.2@14.163,61.784 14.609,62.23 16.256,62.23 v1(16.764,61.722) ; v1(18.952,61.722) 19.015,61.659 19.015,61.503 19.14,61.378 U2.4@19.625,61.378
  Bottom Layer w0.12: v1(16.764,61.722) v1(18.952,61.722)
NetR20_2: R20.2 U1.10 | length 2.3
  Top Layer w0.254: U1.10@27.794,19.675 27.794,18.916 28.453,18.257 28.578,18.257 28.826,18.009 R20.2@28.826,17.884
NetR28_1: R28.1 R33.2 | length 1.7
  Top Layer w0.254: R28.1@26.99,56.838 R33.2@28.641,56.838
NetR29_1: R29.1 R34.2 | length 1.5
  Top Layer w0.254: R29.1@26.924,62.726 R34.2@28.448,62.726
NRST: C41.1 J4.12 U7.7 | length 34.9
  Top Layer w0.18: J4.12@48.54,8.135 48.54,9.767 48.6,9.827 v1(48.6,9.9) ; v1(68.072,6.604) 68.072,8.835 65.579,11.328 65.579,13.929 66.426,14.776 66.426,14.813 66.441,14.828 U7.7@66.92,14.828 67.399,14.828 67.414,14.843 67.414,14.88 68.077,15.543 C41.1@68.767,15.543
  Bottom Layer w0.18: v1(48.6,9.9) 51.896,6.604 53.848,6.604 v1(68.072,6.604)
OVPSET: R23.1 R29.2 TP16.1 U2.18 | length 17.4
  Top Layer w0.12: U2.18@22.925,59.878 23.633,59.878 23.761,59.75 v1(23.85,59.75) ; v1(25.4,60.475) 26.173,60.475 26.484,60.786 26.484,60.911 26.799,61.226 R29.2@26.924,61.226 27.049,61.226 27.364,60.911 27.364,60.786 27.65,60.5 R23.1@27.65,59.7 27.965,60.14 28.015,60.14 28.375,60.5 30.182,60.5 30.738,59.944 TP16.1@37.846,59.944
  Bottom Layer w0.12: v1(23.85,59.75) 24.675,59.75 v1(25.4,60.475)
PA_0: P1.2 U7.14 | length 39.3
  Top Layer w0.18: v1(57.5,15.1) 62.2,15.1 65.428,18.328 U7.14@66.92,18.328
  Top Layer w0.254: P1.2@35.04,4 43,11.96 v1(43,12) ; v1(43.5,15) 54.047,15 54.147,15.1 v1(54.2,15.1)
  Bottom Layer w0.254: v1(43,12) 43,14.5 v1(43.5,15) ; v1(54.2,15.1) v1(57.5,15.1)
PA_1: P1.3 U7.15 | length 42
  Top Layer w0.18: v1(57.5,15.8) 62.2,15.8 65.228,18.828 U7.15@66.92,18.828
  Top Layer w0.254: P1.3@32.5,4 33.652,5.152 35.352,5.152 v1(42.2,12) ; v1(43.5,15.8) v1(54.2,15.8)
  Bottom Layer w0.254: v1(42.2,12) 42.2,14.5 v1(43.5,15.8) ; v1(54.2,15.8) v1(57.5,15.8)
PA_2: P1.4 U7.16 | length 44.9
  Top Layer w0.18: v1(57.5,16.5) 57.783,16.217 61.9,16.217 65.011,19.328 U7.16@66.92,19.328
  Top Layer w0.254: P1.4@29.96,4 31.76,5.8 35.2,5.8 v1(41.4,12) ; v1(43.5,16.5) v1(54.2,16.5)
  Bottom Layer w0.254: v1(41.4,12) 41.4,14.4 v1(43.5,16.5) ; v1(54.2,16.5) v1(57.5,16.5)
PA_3: P1.5 U7.17 | length 51.6
  Top Layer w0.18: U7.17@65.079,21.17 65.079,21.185 65.094,21.2 v1(66.5,21.2)
  Top Layer w0.254: v1(57.5,12.1) 64.2,12.1 v1(65.1,13)
  Bottom Layer w0.18: P1.5@27.42,4 29.92,6.5 44.302,6.5 49.902,12.1 v1(57.5,12.1) ; v1(65.1,13) 66.5,14.4 v1(66.5,21.2)
PA_4: P1.6 U7.20 | length 50.7
  Top Layer w0.18: v1(57.5,12.7) 57.6,12.8 v1(63.6,12.8) ; U7.20@63.579,21.17 63.579,20.221 v1(63.6,20.2)
  Bottom Layer w0.18: P1.6@24.88,4 27.98,7.1 44.2,7.1 49.8,12.7 v1(57.5,12.7) ; v1(63.6,12.8) v1(63.6,20.2)
PA_5: P1.7 U7.21 | length 52.4
  Top Layer w0.18: v1(57.5,13.3) 57.8,13.6 v1(63.1,13.6) ; v1(62.99,20.226) 62.99,20.299 63.079,20.387 U7.21@63.079,21.17
  Bottom Layer w0.18: P1.7@22.34,4 26.12,7.78 44.125,7.78 49.645,13.3 v1(57.5,13.3) ; v1(62.99,20.226) 63.1,20.116 v1(63.1,13.6)
PA_6: P1.8 U7.22 | length 53.2
  Top Layer w0.187: v1(57.5,14) 58,14.5 v1(61.3,14.5) ; v1(62.3,20.2) 62.579,20.479 U7.22@62.579,21.17
  Bottom Layer w0.187: P1.8@19.8,4 24.2,8.4 44.1,8.4 49.576,13.876 49.64,13.876 49.764,14 v1(57.5,14) ; v1(61.3,14.5) 61.3,14.571 61.4,14.671 61.4,19.49 61.51,19.6 61.7,19.6 v1(62.3,20.2)
PVCC: NT2.1 U2.2 U2.3 | length 1.2
  Top Layer w0.12: 18.934,62.375 18.937,62.378
  Top Layer w0.254: 18.937,62.378 U2.2@19.625,62.378 U2.3@19.625,61.878
Right_Out+: R9.2 TP3.1 U4.29 | length 52.4
  Top Layer w0.254: U4.29@89.308,54.975 89.308,61 90.035,61.727 90.035,61.733 90.3,61.998 v1(90.3,62.2) 105.5,62.2 v1(107.5,60.2) ; v1(127.5,45.9) R9.2@128.35,45.9
  Bottom Layer w0.254: v1(107.5,60.2) 110.3,57.4 116,57.4 v1(127.5,45.9)
Right_Out-: R7.2 TP4.1 U4.30 | length 61.7
  Top Layer w0.254: v1(87.8,62.2) 87.8,62 88.808,60.992 U4.30@88.808,54.975 ; v1(90.6,60.4) 106,60.4 v1(106.8,59.6) ; v1(131.8,41.8) 131.8,42.698 R7.2@131.826,42.724
  Bottom Layer w0.254: v1(87.8,62.2) 89.6,60.4 v1(90.6,60.4) ; v1(106.8,59.6) 106.8,58.5 110.3,55 111.4,55 121.2,45.2 123.7,45.2 127.1,41.8 v1(131.8,41.8)
STAT: R31.1 U2.9 | length 8.4
  Top Layer w0.12: R31.1@12.192,60.44 12.565,60.394 18.265,60.394 18.593,60.066 18.593,59.507 19.2,58.9 19.603,58.9 U2.9@19.625,58.878
SW: C33.2 L1.1 TP20.1 U2.1 U2.24 | length 11.6
  Top Layer w0.254: TP20.1@14.2,68.9 17.836,65.264 L1.1@21.148,65.264 ; U2.24@22.025,62.778 24.873,62.778 C33.2@25.146,62.701
SWCLK: J4.6 U7.49 | length 17.9
  Top Layer w0.187: J4.6@44.78,8.085 45.007,8.312 45.007,9.407 46.2,10.6 49.9,10.6 53.3,7.2 56.3,7.2 57.579,8.479 U7.49@57.579,9.987
SWDIO: J4.4 U7.46 | length 14.9
  Top Layer w0.18: J4.4@43.46,8.135 43.74,8.415 43.74,9.64 46.928,12.828 U7.46@55.737,12.828
SWO: J4.8 U7.55 | length 19.4
  Top Layer w0.18: J4.8@46,8.135 46.28,7.855 46.28,6.82 47.4,5.7 57.783,5.7 ccw(c57.783,5.88) 57.891,5.736 ccw(c57.783,5.88) 57.91,5.753 58.363,6.205 58.363,7.063 58.6,7.3 59.519,7.3 59.793,7.574 59.793,8.759 60.4,9.366 60.4,9.378 60.515,9.493 60.564,9.493 60.579,9.508 U7.55@60.579,9.987
TS: R24.1 R27.2 R30.2 TP15.1 U2.10 | length 60
  Top Layer w0.12: v1(18.796,52.578) v1(35.814,52.578) ; v1(36.322,61.722) TP15.1@37.846,61.722
  Top Layer w0.254: R30.2@15.814,55.975 17.844,55.975 R24.1@17.846,55.977 18.15,56.25 v1(18.796,57.15) ; v1(18.796,58.42) 18.849,58.42 18.891,58.378 U2.10@19.625,58.378
  Bottom Layer w0.12: R27.2@18.735,79.051 18.034,78.35 18.034,64.008 19.558,62.484 19.558,61.722 18.796,60.96 v1(18.796,58.42) ; v1(18.796,52.578) v1(18.796,57.15) ; v1(35.814,52.578) 35.814,61.214 v1(36.322,61.722)
  Bottom Layer w0.254: v1(18.796,57.15) v1(18.796,58.42)
USB_PD_IC_Fault: Q2.1 U1.9 | length 1.9
  Top Layer w0.254: Q2.1@27.189,17.795 27.294,17.9 U1.9@27.294,19.675
V_Bias: R1.2 R4.2 U5.6 U5.7 | length 43.7
  Top Layer w0.254: R1.2@133.35,51.336 133.475,51.336 133.723,51.088 133.723,50.963 134.462,50.224 134.462,50.138 v1(134.5,50.1) ; U5.7@139.065,20.7 U5.6@139.065,20.2 139.437,20.2 139.564,20.073 ; v1(140,18.5) 140,19.676 139.603,20.073 139.564,20.073 ; R4.2@142.494,20.196 141.363,20.196 141.241,20.073 139.564,20.073
  Bottom Layer w0.254: v1(134.5,50.1) 134.462,50.062 134.309,50.062 134.023,49.776 134.023,48.582 134.55,48.055 134.55,41.099 134.699,40.95 137.65,40.95 140,38.6 v1(140,18.5)
VBATT: BT1.1 C35.1 C36.1 Q1.3 R19.2 TP21.1 U2.15 | length 31.9
  Top Layer w0.12: U2.15@22.925,58.378 22.967,58.336 23.288,58.336 23.457,58.166 23.874,58.166 24.128,57.912 v1(24.13,57.912) ; C35.1@27.94,66.278 36.207,66.278 TP21.1@37.785,64.7
  Top Layer w0.5: BT1.1@24.45,79.051 Q1.3@24.45,76.06 Q1.3@24.51,76
  Top Layer w0.7: v1(25.908,65.278) C36.1@25.908,66.278 ; R19.2@27.934,69.526 25.908,67.5 C36.1@25.908,66.278 ; C35.1@27.94,66.278 C36.1@25.908,66.278
  Bottom Layer w0.12: v1(24.13,57.912) 26.346,57.912 26.416,57.982 26.416,59.519 26.415,59.52 26.415,59.86 26.416,59.861 26.416,64.77 v1(25.908,65.278)
  other v1: 27.7,70.8 28.3,70.8 27.7,71.4 28.3,71.4 26.5,75.7 27.1,75.7 26.5,76.3 27.1,76.3
VBUS_FET_EN: R17.1 TP23.1 U1.3 | length 20.9
  Top Layer w0.254: v1(24.4,22.3) 24.883,21.817 U1.3@25.652,21.817 ; v1(30.1,35.6) 30.138,35.638 30.138,35.788 30.727,36.377 30.727,36.502 30.975,36.75 R17.1@31.1,36.75 TP23.1@33.3,36.75
  Bottom Layer w0.254: v1(24.4,22.3) 24.4,26.395 cw(c24.654,26.395) 24.451,26.547 cw(c24.654,26.395) 24.474,26.574 30.026,32.126 ccw(c29.846,32.305) 30.049,32.153 ccw(c29.846,32.305) 30.1,32.305 v1(30.1,35.6)
VBUS_Min_Max: R26.1 R36.2 TP24.1 U1.1 U1.2 | length 7.1
  Top Layer w0.12: U1.2@25.652,22.317 U1.1@25.652,22.817
  Top Layer w0.254: R36.2@21.194,25.033 21.244,24.983 R26.1@23.099,24.983 TP24.1@23.099,22.817 U1.1@25.652,22.817
VCAP1: C52.1 U7.31 | length 2.2
  Top Layer w0.18: U7.31@58.079,21.17 58.079,21.321 58.094,21.336 58.085,21.345 58.085,21.672 58.166,21.754 58.166,22.94 C52.1@58.08,23.3
VCAP2: C53.1 U7.47 | length 2.7
  Top Layer w0.18: C53.1@53.848,10.88 54.122,11.154 54.122,11.45 55,12.328 U7.47@55.737,12.328
VCC: C10.1 C20.1 C30.1 SB2.2 U3.3 U5.8 U6.8 | length 146.9
  Top Layer w0.254: SB2.2@81.803,76.133 85.7,80.03 v1(85.7,80.7) ; U6.8@137.033,47.903 137.033,49.099 137.612,49.678 137.662,49.678 137.885,49.901 C20.1@137.885,49.951 137.934,50 v1(138.7,50) ; U5.8@139.065,21.2 140.421,21.2 140.57,21.051 140.57,21.005 140.793,20.782 140.843,20.782 140.852,20.791 141.591,20.791 v1(141.6,20.8)
  Top Layer w0.5: 82.1,76.133 C30.1@85.867,76.133 U3.3@88.901,76.133
  PWR/GND w0.254: v1(85.7,80.7) 108,80.7 108.475,80.225 115.625,80.225 116.75,81.35 139.1,81.35 145.25,75.2 145.25,71.474 145.399,71.325 148.2,71.325 149.15,70.375 149.15,61.275 138.7,50.825 v1(138.7,50)
  Bottom Layer w0.254: v1(138.7,50) 141.2,50 142.2,49 142.2,46.4 141.6,45.8 v1(141.6,20.8)
VCC_Raw: C24.1 C25.1 C26.1 D3.2 J3.A4_B9 J3.B4_A9 R15.2 U1.18 U8.7 U8.8 | length 72.1
  Top Layer w0.18: U1.18@29.436,22.817 30.417,22.817 v1(30.5,22.9)
  Top Layer w0.254: J3.B4_A9@5.972,31.001 7.632,31.001 D3.2@8.011,30.622 ; 12.065,37.445 14.789,34.721 24.685,34.721 28.806,30.6 v1(30.5,30.6) ; C26.1@23.225,38.95 23.225,41.004 R15.2@23.346,41.125 23.402,41.069 U8.8@25.069,41.069 C24.1@25.069,43.1 C25.1@25.069,44.9
  Top Layer w0.7: 3.81,34.798 4.813,35.801 J3.A4_B9@5.972,35.801 7.179,35.801 ; 4.813,31.001 J3.B4_A9@5.972,31.001
  Top Layer w1: 3.81,34.798 3.81,32.004 4.813,31.001 ; 7.179,35.801 8.823,37.445 12.065,37.445 24.045,37.445 25,38.4 25,40.364 25.039,40.403 25.039,41.04 U8.8@25.069,41.069 U8.7@26.339,41.069
  Bottom Layer w0.254: v1(30.5,22.9) v1(30.5,30.6)
VCC_Test: C23.1 NT1.2 Q1.2 R13.2 SB2.1 | length 28.6
  Top Layer w0.254: NT1.2@18.425,63.147 18.425,63.312
  Top Layer w0.4: 18.425,63.312 16.537,65.2 R13.2@12.825,65.2 12.825,70.025 17.4,74.6 24.46,74.6 Q1.2@25.4,73.66
  Top Layer w0.5: C23.1@80.803,73.847 80.803,75.971 SB2.1@80.965,76.133
VCC_USBC: R13.1 R16.1 SB1.2 U2.6 | length 39.7
  Top Layer w0.12: R13.1@10.175,65.2 10.4,64.975 v1(10.4,63.6) ; v1(16.2,61) 16.235,61 16.435,60.8 18.3,60.8 18.722,60.378 U2.6@19.625,60.378
  Top Layer w0.254: v1(13.716,48.26) 13.754,48.222 13.892,48.222 13.945,48.169 SB1.2@29.307,48.169 29.21,48.266 ; R16.1@14.163,59.234 14.224,59.173 v1(14.224,57.912)
  Bottom Layer w0.12: v1(10.4,63.6) 10.8,63.2 14.8,63.2 16.2,61.8 v1(16.2,61)
  Bottom Layer w0.254: v1(13.716,48.26) 13.716,57.404 v1(14.224,57.912)
VCC_USBC_Test: C27.1 SB1.1 U1.11 U8.5 U8.6 | length 35
  Top Layer w0.18: U1.11@28.294,19.675 28.294,19.106 28.7,18.7 v1(31.7,18.7)
  Top Layer w0.254: U8.6@27.609,41.069 U8.5@28.879,41.069 31.044,41.069 C27.1@31.1,41.125 34.275,41.125 35.1,40.3 v1(35.1,25.879)
  Bottom Layer w0.254: v1(31.7,18.7) 35.1,22.1 v1(35.1,25.879)
VDDD: C38.1 C39.1 C40.2 R25.2 R26.2 U1.23 | length 19.1
  Top Layer w0.254: R25.2@21.587,18.773 21.587,19.787 v1(21.6,19.8) ; v1(22.2,25.9) 22.535,26.235 22.976,26.235 23.224,26.483 23.826,25.881 26.946,25.881 27.521,25.306 27.521,25.256 C38.1@27.744,25.033 ; U1.23@26.794,23.459 26.794,23.739 26.915,23.86 26.915,24.154 27.521,24.76 27.521,24.81 C38.1@27.744,25.033 ; C39.1@31.1,25.033 C40.2@29.449,25.033 C38.1@27.794,25.033 C38.1@27.744,25.033
  PWR/GND w0.254: v1(21.6,19.8) 21.6,25.3 v1(22.2,25.9)
VREF: C34.1 D4.1 R21.2 R22.2 R23.2 R24.2 TP19.1 U2.12 | length 34.8
  Top Layer w0.12: R22.2@25.339,56.838 26.043,56.134 v1(29.464,56.134) 29.972,56.642 TP19.1@37.846,56.642
  Top Layer w0.254: D4.1@11.75,54.413 13.011,54.413 13.716,55.118 17.349,55.118 17.498,54.969 17.498,54.9 17.771,54.627 R24.2@17.846,54.627 18.059,54.84 18.539,54.84 19.478,55.779 19.478,55.829 19.701,56.052 C34.1@19.751,56.052 R21.2@21.402,56.052 21.425,56.075 v1(21.425,56.825) ; C34.1@19.801,56.052 20.024,56.275 20.024,56.325 20.525,56.826 U2.12@20.525,57.478 ; v1(23.05,56.825) 23.063,56.838 R22.2@25.339,56.838 ; R23.2@29.15,59.7 v1(29.924,59.7)
  Bottom Layer w0.12: v1(29.464,56.134) 29.718,56.388 29.718,59.235 29.887,59.404 29.887,59.663 v1(29.924,59.7)
  Bottom Layer w0.254: v1(21.425,56.825) v1(23.05,56.825)
pads on no net: J2.1 J2.M1 J2.M2 J3.A8 J3.B8 J4.1 J4.2 J4.9 J4.11 J4.13 J4.14 U1.4 U1.7 U1.8 U1.16 U1.17 U1.20 U1.21 U2.7 U2.8 U2.14 U4.10 U4.11 U4.14 U4.27 U4.28 U7.2 U7.8 U7.9 U7.23 U7.24 U7.25 U7.26 U7.27 U7.28 U7.30 U7.35 U7.36 U7.38 U7.39 U7.40 U7.41 U7.42 U7.43 U7.51 U7.52 U7.53 U7.54 U7.56 U7.57 U7.61 U7.62

## Polygon pours and split planes (outlines as drawn)
GND on Top Layer "NONET_L-01_P-001" (solid, pour order 24): 25.5,84.625 27,84.625 27,78.275 25.5,78.275
GND on Top Layer "NONET_L-01_P-001" (solid, pour order 22): 110,85 110,47.5 97.5,47.5 97.5,42.5 92.5,42.5 92.5,30 82.5,30 82.5,2.5 85,2.5 85,27.5 95,27.5 95,40 100,40 100,45 112.5,45 112.5,85
3V3+ on Top Layer "NONET_L-01_P-001" (solid, pour order 17): 90.513,77.308 90.5,77.295 90.5,74.5 88,74.5 88,65 94.551,65 94.551,74.452 92.048,74.452 91.99,74.51 91.99,77.308 90.488,77.308
GND on Top Layer "NONET_L-01_P-001" (solid, pour order 11): 152.5,2.5 150,2.5 150,82.5 152.5,82.5
GND on Top Layer "NONET_L-01_P-001" (solid, pour order 9): 152.5,2.5 152.5,0 0,0 0,85 152.5,85 152.5,82.5 2.5,82.5 2.5,2.5
VCC_Test on Top Layer "NONET_L-01_P-001" (solid, pour order 7): 24.6,73.2 81.3,73.2 81.4,73.3 81.4,74.8 24.6,74.8
VBATT on Top Layer "NONET_L-01_P-001" (solid, pour order 6): 23.9,76.6 27.4,76.6 27.4,75.4 23.9,75.4
VBATT on Top Layer "NONET_L-01_P-001" (solid, pour order 4): 27.4,71.7 27.4,69.5 28.7,69.5 28.7,71.7
VCC_USBC on Top Layer "NONET_L-01_P-001" (solid, pour order 3): 30.1,47.9 30.1,50.9 8.6,50.9 8.5,50.8 8.5,63.9 11.5,63.9 11.5,66.6 4.1,66.6 4.3,66.4 4.3,48.3 4.7,47.9
VCC_USBC_Test on Top Layer "NONET_L-01_P-001" (solid, pour order 1): 28.2,40.3 29.4,40.3 29.4,41.8 29.6,41.8 30.1,42.3 30.1,47.4 28.2,47.4
SW on Top Layer "NONET_L-01_P-001" (solid, pour order 0): 20.32,65.278 20.32,62.484 22.352,62.484 22.352,65.278
no net on Top Overlay "NONET_L-01_P-001" (hatched 45Degree grid 0.508 track 0.12): 123.75,36.25 123.75,2.5 150,2.5 150,3.75 125,3.75 125,36.25
no net on Top Overlay "NONET_L-01_P-001" (hatched 45Degree grid 0.508 track 0.12): 128.75,55 125,55 125,37.5 150,37.5 150,36.25 123.75,36.25 123.75,56.25 128.75,56.25
no net on Top Overlay "NONET_L-01_P-001" (hatched 45Degree grid 0.508 track 0.12): 40,51.25 47.5,51.25 47.5,82.5 48.75,82.5 48.75,50 40,50
no net on Top Overlay "NONET_L-01_P-001" (hatched 45Degree grid 0.508 track 0.12): 38.75,30 38.75,50 26.25,50 26.25,46.25 20,46.25 20,42.5 2.5,42.5 2.5,43.75 18.75,43.75 18.75,47.5 25,47.5 25,51.25 40,51.25 40,30
no net on Top Overlay "NONET_L-01_P-001" (hatched 45Degree grid 0.508 track 0.12): 82.5,30 38.75,30 38.75,12.5 2.5,12.5 2.5,11.25 40,11.25 40,28.75 82.5,28.75
no net on Top Overlay "NONET_L-01_P-001" (hatched 45Degree grid 0.508 track 0.12): 125,82.5 125,56.25 150,56.25 150,55 123.75,55 123.75,82.5
GND on Bottom Layer "GND_L04_P013" (solid, pour order 13): 152.5,2.5 152.5,0 0,0 0,85 152.5,85 152.5,82.5 2.5,82.5 2.5,2.5
GND on Bottom Layer "GND_L04_P012" (solid, pour order 12): 152.5,2.5 150,2.5 150,82.5 152.5,82.5
VBATT on Bottom Layer "NONET_L-01_P-001" (solid, pour order 5): 27.4,70.6 28.7,70.6 28.7,76.5 28.6,76.6 26.2,76.6 26.2,75.5 27.4,75.5
GND on Top Solder "NONET_L-01_P-001" (solid, pour order 23): 110,85 110,47.5 97.5,47.5 97.5,42.5 92.5,42.5 92.5,30 82.5,30 82.5,2.5 85,2.5 85,27.5 95,27.5 95,40 100,40 100,45 112.5,45 112.5,85
no net on Top Solder "NONET_L-01_P-001" (solid, pour order 10): 152.5,2.5 150,2.5 150,82.5 152.5,82.5
no net on Top Solder "NONET_L-01_P-001" (solid, pour order 8): 152.5,2.5 152.5,0 0,0 0,85 152.5,85 152.5,82.5 2.5,82.5 2.5,2.5
no net on Bottom Solder "NONET_L-01_P-001" (solid, pour order 16): 152.5,2.5 152.5,0 0,0 0,85 152.5,85 152.5,82.5 2.5,82.5 2.5,2.5
no net on Bottom Solder "NONET_L-01_P-001" (solid, pour order 15): 152.5,2.5 150,2.5 150,82.5 152.5,82.5
3V3+ on PWR/GND "3V3+_L03_P020" (solid, pour order 20): 0,0 0,85 152.5,85 152.5,0
GND on PWR/GND "NONET_L-01_P-001" (solid, pour order 18): 59,16 59,52 65,58 75,58 75,43.671 66.329,43.671 66.329,16
GND on GND "NONET_L-01_P-001" (solid, pour order 19): 0,0 0,85 152.5,85 152.5,0

## Silkscreen, mask and mechanical layers (free items; w line width, h text height)
Top Overlay:
  drawing of 342 lines, arcs and shapes, not listed
  text "DIGITAL" at 108,82.15 h1.5 r270
  text "ANALOG" at 113,82 h1.5 r270
  text "Power Path Selection/ BATT Charging" at 49.25,78 h1.5 r270
  text "SW" at 10.55,68.45 h1
  text "VBATT" at 39.25,64.25 h1
  text "nBATDRV" at 39.25,62.648 h1
  text "Right Out +" at 91.85,61.783 h1
  text "Right Out -" at 76.15,61.683 h1
  text "Barrel Jack Output (32Ω)" at 123.25,61.25 h1.5 r90
  text "TS" at 39.35,61.046 h1
  text "OVPSET" at 39.25,59.542 h1
  text "ACSET" at 39.25,57.842 h1
  text "HPROUT" at 101.65,56.45 h1
  text "VREF" at 39.25,56.139 h1
  text "HPRCOM" at 101.65,54.85 h1
  text "ISET" at 39.25,54.639 h1
  text "HPLCOM" at 101.626,53.352 h1
  text "HPLOUT" at 101.626,51.701 h1
  text "WS" at 72.55,51.2 h1
  text "DRVDD1" at 101.626,50.05 h1
  text "I2S IN" at 72.55,49.7 h1
  text "USBC Data Streaming / PD" at 40.5,48.75 h1.5 r270
  text "I2S OUT" at 72.55,48.2 h1
  text "SCL" at 72.55,46.75 h1
  text "SDA" at 72.55,45.25 h1
  text "DF_Right+" at 85.917,42.44 h1 r270
  text "DF_Right-" at 87.517,42.44 h1 r270
  text "MICBIAS" at 89.183,42.44 h1 r270
  text "Analog_SE_In" at 90.917,42.44 h1 r270
  text "SE Analog Input" at 123.25,41.25 h1.5 r90
  text "Audio Codec / 3V3 LDO" at 54,30.5 h1.5
  text "Analog Inputs / MCU" at 54,26.75 h1.5
  text "VBUS_Min_Max" at 9.27,22.552 h1.09
  text "ISINK_COARSE" at 9.27,20.552 h1.09
  text "SE Analog Output" at 123.25,15 h1.5 r90
  text "Hadi Q" at 86.65,12.65 h1
  text "Rev I" at 86.65,10.65 h1
  text "Aug 2026" at 86.65,8.483 h1
  text "GND" at 17.77,5.85 h1 r90
  text "PA_6" at 20.227,5.85 h1 r90
  text "PA_5" at 22.767,5.85 h1 r90
  text "PA_4" at 25.307,5.85 h1 r90
  text "PA_3" at 27.847,5.85 h1 r90
  text "PA_2" at 30.387,5.85 h1 r90
  text "PA_1" at 32.927,5.85 h1 r90
  text "PA_0" at 35.467,5.85 h1 r90
  text "3V3+" at 38.09,5.85 h1 r90
  text "\" I Know, I See, It's Like Make-Believe, /  Cover Your Ears So You Can /  Hear What I'm Saying.\"" at 86.5,3.502 h1.3
Mechanical 1:
  the board outline again, w0.254
fab_notes:
  drawing of 310 lines, arcs and shapes, not listed
  text "Layer" at 157.397,82.619 h1.52
  text "Name" at 167.809,82.619 h1.52
  text "Material" at 191.425,82.619 h1.52
  text "Thickness" at 205.645,82.619 h1.52
  text "Constant" at 222.151,82.619 h1.52
  text "Board Layer Stack" at 236.626,82.619 h1.52
  text "Top Overlay" at 167.809,79.571 h1.52
  text "Top Solder" at 167.809,76.523 h1.52
  text "SM-002" at 192.44,76.523 h1.52
  text "1.00mil" at 207.677,76.523 h1.52
  text "4" at 227.102,76.523 h1.52
  text "1" at 157.397,73.475 h1.52
  text "Top Layer" at 167.809,73.475 h1.52
  text "1.38mil" at 207.677,73.475 h1.52
  text "Dielectric 2" at 167.809,70.427 h1.52
  text "PP-006" at 192.44,70.427 h1.52
  text "4.58mil" at 207.55,70.427 h1.52
  text "4.1" at 225.96,70.427 h1.52
  text "2" at 157.397,67.379 h1.52
  text "GND" at 167.809,67.379 h1.52
  text "CF-004" at 192.44,67.379 h1.52
  text "0.60mil" at 207.55,67.379 h1.52
  text "Dielectric 1" at 167.809,64.331 h1.52
  text "FR-4" at 193.964,64.331 h1.52
  text "49.80mil" at 206.788,64.331 h1.52
  text "4.8" at 225.706,64.331 h1.52
  text "3" at 157.397,61.283 h1.52
  text "PWR/GND" at 167.809,61.283 h1.52
  text "CF-004" at 192.44,61.283 h1.52
  text "0.60mil" at 207.55,61.283 h1.52
  text "Dielectric 3" at 167.809,58.235 h1.52
  text "PP-006" at 192.44,58.235 h1.52
  text "4.58mil" at 207.55,58.235 h1.52
  text "4.1" at 225.96,58.235 h1.52
  text "4" at 157.397,55.187 h1.52
  text "Bottom Layer" at 167.809,55.187 h1.52
  text "1.38mil" at 207.677,55.187 h1.52
  text "Bottom Solder" at 167.809,52.139 h1.52
  text "SM-002" at 192.44,52.139 h1.52
  text "1.00mil" at 207.677,52.139 h1.52
  text "4" at 227.102,52.139 h1.52
  text "Bottom Overlay" at 167.809,49.091 h1.52
  text "Total board thickness:" at 157.397,46.043 h1.52
  text "64.92mil" at 206.788,46.043 h1.52

## Text inside footprints (layer, text, board x,y; h text height)
BT1: Top Overlay "+" at 24.092,79.542 h1; Top Overlay "-" at 25.87,79.463 h1
D4: Top Overlay "+" at 12.075,51.475 h0.8 r90
J1: Top Overlay "+" at 148.742,20.191 h1; Top Overlay "-" at 150.52,20.112 h1
J5: Top Overlay "+" at 148.764,47.491 h1; Top Overlay "-" at 150.542,47.412 h1